# Altium PCB pcb 2022 prototip_2022-08-15.pcbdoc (part 2 of 2)
Units mm, origin at the board's own origin, x right, y up, seen from the top; angles counter-clockwise.
Board outline 345.4 x 226.4 mm, 2 copper layers (Top Layer, Bottom Layer); 44 components, 59 nets, 156 pads, 0 vias.
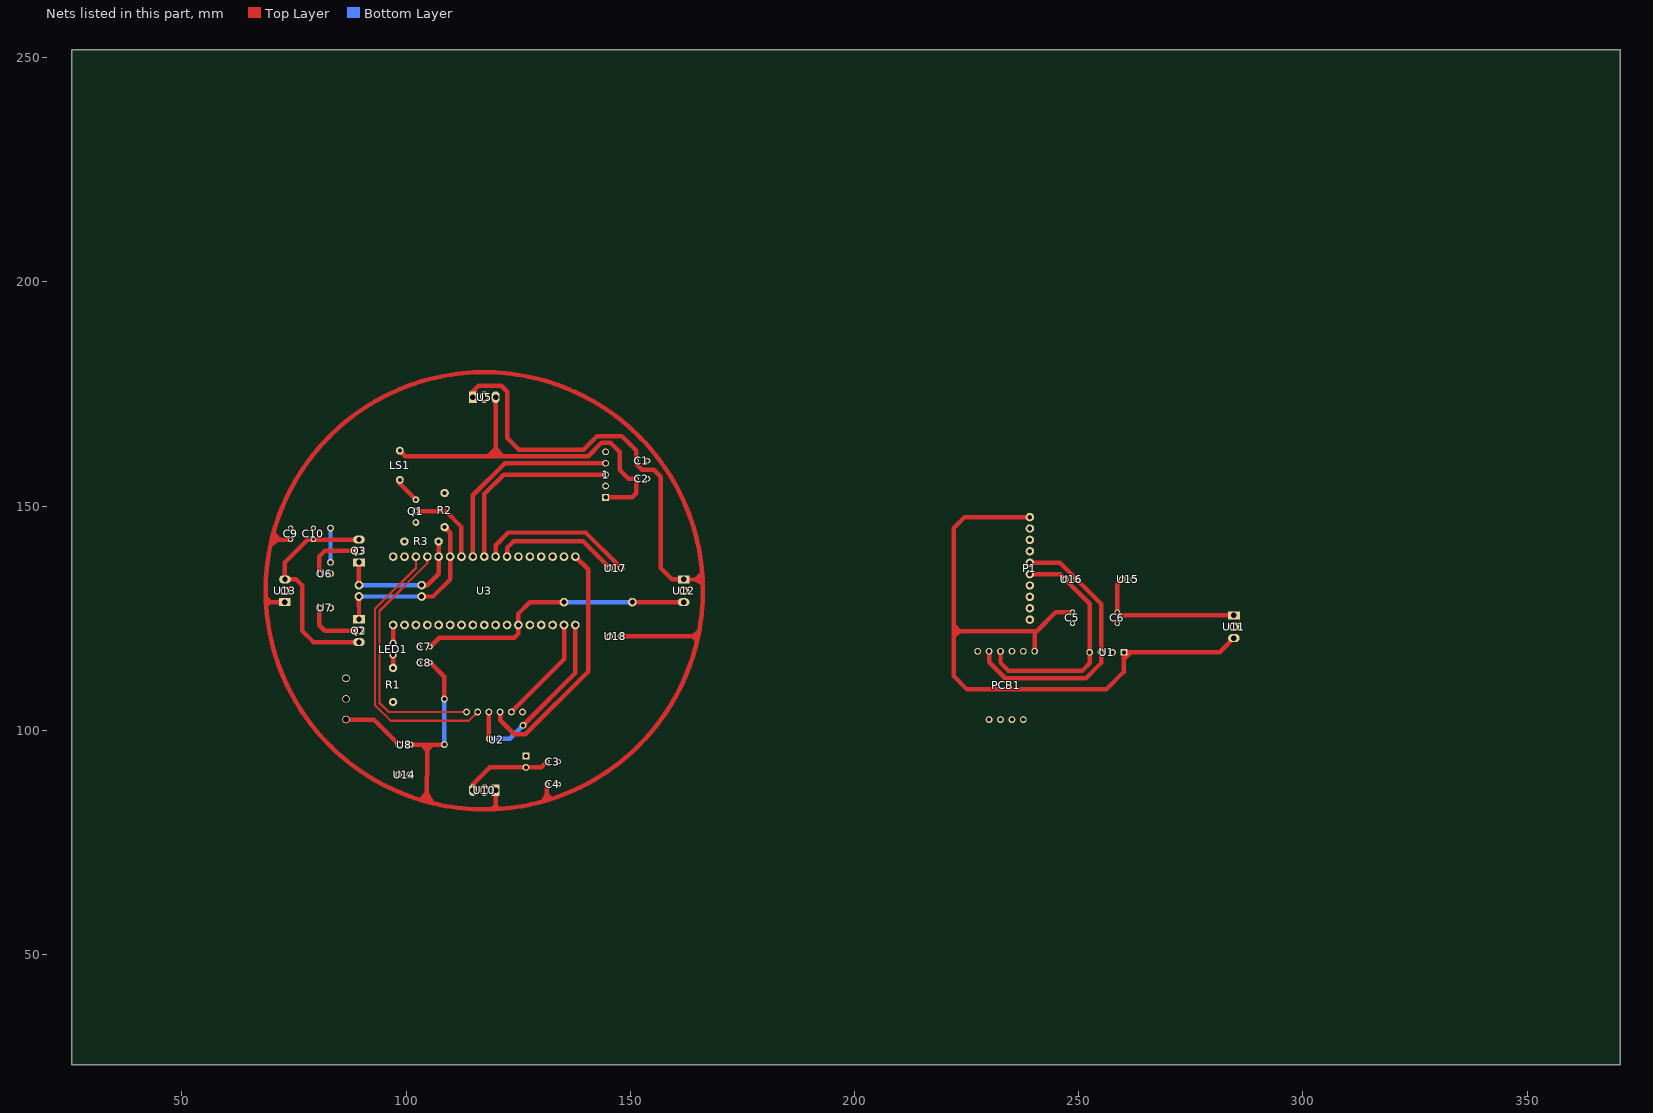
[diagram p2: the nets of this part, all layers, seen from the top]

## Nets (pads, with @x,y where several pads share a name; then routed paths per layer and width w, separated by ;. In a path a pad name is that pad's centre, name@x,y a point inside that pad or via, vN(x,y) a via of type N, cw(c..) or ccw(c..) an arc to the next point about the centre after c; other vN are vias at no path point)
1_5: 1.5
ARDUINO5V: C7.2 pad.P$12 U3.P$23 U12.3 | length 63.3
  Top Layer w1: C7.2@105.37,118.6 107.37,120.6 124.1,120.6 125.06,121.56 U3.P$23@125.06,123.48 125.06,126.02 127.6,128.56 pad.P$12@135.22,128.56 ; pad.P$12@150.46,128.56 U12.3@161.885,128.56
  Bottom Layer w1: pad.P$12@135.22,128.56 pad.P$12@150.46,128.56
ARDUINOBUZZER: Q1.2 U3.P$7 | length 18.2
  Top Layer w1: Q1.2@102.2,148.88 108.819,148.88 112.36,145.339 U3.P$7@112.36,138.72
ARDUINOLED: LED1.1 U3.P$34 | length 4.1
  Top Layer w1: LED1.1@97.1,119.37 97.1,123.46 U3.P$34@97.12,123.48
DIGITALPIN7: pad.14 Q2.1 R2.2 U3.P$6 | length 39.1
  Top Layer w1: pad.14@89.5,129.83 Q2.1@89.505,124.75 ; pad.14@103.47,129.83 106.01,129.83 109.82,133.64 U3.P$6@109.82,138.72 109.82,144.07 R2.2@108.6,145.29
  Bottom Layer w1: pad.14@89.5,129.83 pad.14@103.47,129.83
DIGITALPIN8: pad.13 Q3.1 R3.2 U3.P$5 | length 31.1
  Top Layer w1: Q3.1@89.495,137.45 pad.13@89.5,132.37 ; pad.13@103.47,132.37 104.74,132.37 107.28,134.91 U3.P$5@107.28,138.72 107.28,142.07 R3.2@107.25,142.1
  Bottom Layer w1: pad.13@89.5,132.37 pad.13@103.47,132.37
GND: 1.2 C1.1 C2.1 C3.1 C4.1 C5.1 C6.1 C7.1 C8.1 C9.1 C10.1 P1.9 pad.2 PCB1.3 Q1.1 R1.2 R2.1 R3.1 U1.2 U2.2 U3.P$12 U3.P$21 U5.2 U6.2 U7.2 U10.2 U11.2 U12.2 U13.2 U14.1 U14.2 U15.2 U18.1 | length 7.6
  Bottom Layer w1: pad.2@83.15,137.45 pad.2@83.15,145.07
GPS5V: 1.1 C2.2 LS1.- U5.3 | length 92.3
  Top Layer w1: LS1.-@98.6,162.35 99.85,161.1 121.397,161.1 ; 118.316,161.1 118.316,161.133 119.98,162.774 ; 119.98,161.1 119.98,166.755 ; U5.3@119.98,174.275 119.98,162.774 ; 1.1@144.491,151.928 150.427,151.928 151.329,152.83 C2.2@151.329,156.101 ; C2.2@151.329,156.094 149.599,156.094 147.6,158.1 147.6,162.113 145.601,164.1 143.599,164.1 140.6,161.097 121.601,161.097 119.98,162.774
GPSRX: 1.4 U3.P$8 | length 46.2
  Top Layer w1: U3.P$8@114.9,138.72 114.9,152.4 122.048,159.548 1.4@144.491,159.548
GPSTX: 1.3 U3.P$9 | length 42.8
  Top Layer w1: U3.P$9@117.44,138.72 117.44,152.69 121.758,157.008 1.3@144.491,157.008
LS1_+: LS1.+ Q1.3 | length 5.9
  Top Layer w1: LS1.+@98.6,155.85 98.6,155.02 Q1.3@102.2,151.42
MISO: U2.4 U3.P$19 | length 24.3
  Top Layer w1: U2.4@123.476,104.076 135.22,115.82 U3.P$19@135.22,123.48
MOSI: U2.5 U3.P$17 | length 55.4
  Top Layer w1: U2.5@120.976,104.076 120.976,102.223 124.1,99.101 126.599,99.101 140.6,113.099 140.6,135.88 U3.P$17@137.76,138.72
NRF5V: C3.2 U2.1 U10.3 | length 19.9
  Top Layer w1: U10.3@114.9,86.655 114.9,87.92 118.71,91.73 U2.1@126.726,91.725 ; U2.1@126.726,91.726 130.136,91.726 C3.2@131.41,93
NRFCE: U2.8 U3.P$4 | length 57.2
  Top Layer w0.5: U3.P$4@104.74,138.72 104.74,137.24 94.1,126.6 94.1,106.1 96.124,104.076 U2.8@113.476,104.076
NRFCSN: U2.7 U3.P$3 | length 62
  Top Layer w0.5: U3.P$3@102.2,138.72 102.2,136.2 93.099,127.099 93.099,105.601 96.599,102.101 114.001,102.101 U2.7@115.976,104.076
NRFSCK: pad.6 U2.6 U3.P$18 | length 42
  Top Layer w1: U2.6@118.476,104.076 118.476,98.224 pad.6@118.6,98.1 ; pad.6@126.099,101.1 137.76,112.759 U3.P$18@137.76,123.48
  Bottom Layer w1: pad.6@118.6,98.1 123.1,98.1 pad.6@126.1,101.1
P1_1: P1.1
P1_2: P1.2
P1_3: P1.3
P1_4: P1.4
P1_7: P1.7
P1_8: P1.8
PCB1_2: PCB1.2
PCB1_6: PCB1.6
PCB1_7: PCB1.7
PCB1_8: PCB1.8
PCB1_9: PCB1.9
PCB1_10: PCB1.10
PILGND: pad.3 U8.2 | length 14.1
  Top Layer w1: pad.3@86.6,102.4 92.77,102.4 U8.2@98.36,96.81
R1_1: LED1.2 R1.1 | length 2.9
  Top Layer w1: R1.1@97.1,113.91 LED1.2@97.1,116.83
S$1271: 
SCL: P1.6 PCB1.5 U1.3 U3.P$10 U16.2 U17.2 | length 98.2
  Top Layer w1: U3.P$10@119.98,138.72 119.98,141.26 122.82,144.1 140.031,144.1 U17.2@147.95,136.18 ; PCB1.5@230.012,117.617 230.013,115.187 233.599,111.6 251.6,111.6 254.981,114.981 U1.3@254.981,117.384 254.981,128.209 U16.2@249.55,133.64 245.819,137.369 P1.6@239.101,137.369
SDA: P1.5 PCB1.4 U1.4 U3.P$11 U16.1 U17.1 | length 81.1
  Top Layer w1: U3.P$11@122.52,138.72 122.52,140.681 123.94,142.101 139.49,142.101 U17.1@145.41,136.18 ; PCB1.4@232.552,117.617 232.553,115.047 234.28,113.32 250.82,113.32 252.441,114.941 U1.4@252.441,117.384 252.441,128.209 U16.1@247.01,133.64 245.819,134.829 P1.5@239.101,134.829
SENSOR5V: C5.2 P1.10 PCB1.1 U1.1 U11.3 | length 177.4
  Top Layer w1: 222.101,120.986 223.467,122.032 ; 222.101,122.032 227.191,122.032 ; 222.101,130.363 222.101,112.098 225.1,109.101 256.101,109.101 260.099,113.099 260.061,113.14 U1.1@260.061,117.384 281.42,117.384 U11.3@284.595,120.559 ; P1.10@239.101,147.529 224.529,147.529 222.101,145.1 222.101,123.399 223.467,122.032 ; PCB1.1@240.172,117.617 240.172,121.672 244.87,126.37 ; C5.2@248.6,126.37 244.87,126.37 ; 260.061,116.073 260.267,116.073 261.579,117.384 ; 223.467,122.032 240.6,122.1 244.87,126.37
TETIKLEYICILER: C10.2 Q2.3 Q3.3 U13.3 | length 50.7
  Top Layer w1: Q2.3@89.495,119.67 79.34,119.67 76.8,122.21 76.8,132.37 75.53,133.64 U13.3@72.995,133.64 72.995,137.455 78.07,142.53 C10.2@79.34,142.53 Q3.3@89.505,142.53
U2_3: U2.3
U3_P$1: U3.P$1
U3_P$2: U3.P$2
U3_P$13: U3.P$13
U3_P$14: U3.P$14
U3_P$15: U3.P$15
U3_P$16: U3.P$16
U3_P$20: U3.P$20
U3_P$22: U3.P$22
U3_P$24: U3.P$24
U3_P$25: U3.P$25
U3_P$26: U3.P$26
U3_P$27: U3.P$27
U3_P$28: U3.P$28
U3_P$29: U3.P$29
U3_P$30: U3.P$30
U3_P$31: U3.P$31
U3_P$32: U3.P$32
U3_P$33: U3.P$33
U4_1: pad.1@86.6,111.6
U6_1: Q3.2 U6.1 | length 13.2
  Top Layer w1: U6.1@80.64,134.91 80.64,138.75 81.88,139.99 Q3.2@89.495,139.99
U7_1: Q2.2 U7.1 | length 13.2
  Top Layer w1: U7.1@80.64,127.29 80.64,123.45 81.88,122.21 Q2.2@89.505,122.21
VCC: C1.2 C4.2 C6.2 C8.2 C9.2 pad.1@108.55,96.81 pad.1@108.55,106.97 U5.1 U8.1 U10.1 U11.1 U12.1 U13.1 U15.1 U18.2 | length 533
  Top Layer w1: 68.713,129.617 69.779,128.552 ; 68.801,127.819 69.534,128.552 69.779,128.552 ; 70.044,142.53 C9.2@74.26,142.53 ; 70.228,141.653 71.6,142.6 70.721,143.608 ; U13.1@72.985,128.56 69.779,128.552 ; U8.1@100.9,96.81 103.47,96.81 104.74,95.54 ; 102.564,96.81 106.065,96.81 ; 103.272,84.452 104.6,86.1 105.888,83.715 ; 104.638,84.059 104.74,95.54 ; 104.738,94.308 104.738,96.81 ; 104.74,96.81 pad.1@108.55,96.81 ; C8.2@105.37,115.1 108.55,111.92 pad.1@108.55,106.97 ; 105.853,96.81 104.74,95.54 ; U5.1@114.9,174.285 114.9,175.55 116.17,176.82 121.25,176.82 122.599,175.471 122.599,165.1 125.101,162.601 139.599,162.601 142.601,165.601 148.1,165.601 151.331,162.37 C1.2@151.33,160.1 151.331,159.37 152.601,158.1 155.21,158.1 156.81,156.5 156.81,136.18 159.35,133.64 U12.1@161.895,133.64 166.124,133.615 ; 119.111,82.378 119.975,83.241 ; 119.975,83.955 119.975,83.241 ; U10.1@119.975,86.645 119.975,83.241 ; 120.641,82.455 119.975,83.241 ; 130.488,84.128 131.41,85.69 ; C4.2@131.41,87.92 131.41,85.69 ; 132.396,84.699 131.41,85.69 ; U18.2@147.95,120.94 163.871,120.991 ; 164.9,119.962 163.871,120.991 ; 165.342,122.045 163.871,120.991 ; 165.928,134.898 164.6,133.6 166.025,132.708 ; U15.1@259.71,133.64 258.6,132.53 C6.2@258.6,126.37 259.329,125.639 U11.1@284.605,125.639 ; 166.19,131.1 ccw(c117.44,131.1) 166.19,131.1
  Bottom Layer w1: pad.1@108.55,96.81 pad.1@108.55,106.97

## Polygon pours and split planes (outlines as drawn)
GND on Top Layer (solid): 38.1,207.1 38.1,59.1 45.1,52.1 344.1,52.1 358.1,38.1 358.1,181.6 300.6,239.1

## Keep-outs
Keep-Out Layer:
  circle w0.254 net S$1271: c117.44,131.1 r50
  circle w0.254 net S$1271: c254.6,131.1 r50

## Other copper
Top Layer:
  region net TETIKLEYICILER: 72.595,134.54 73.395,134.54 73.495,136.04 72.495,136.04
  region net TETIKLEYICILER: 73.395,134.54 73.395,132.74 74.895,133.14 74.895,134.14
  region net ARDUINO5V: 161.485,129.46 161.485,127.66 159.985,128.06 159.985,129.06
  region net SENSOR5V: 284.995,119.66 284.195,119.66 282.358,119.029 283.466,118.723
  region net NRF5V: 115.74,86.733 114.059,87.376 114.924,88.651 115.947,88.26
  region net GPS5V: 120.88,173.875 119.08,173.875 119.48,172.375 120.48,172.375
  region net TETIKLEYICILER: 89.105,141.63 89.105,143.43 87.605,143.03 87.605,142.03
  region net U6_1: 89.095,139.09 89.095,140.89 87.595,140.49 87.595,139.49
  region net TETIKLEYICILER: 89.095,120.57 89.095,118.77 87.595,119.17 87.595,120.17
  region net U7_1: 89.105,121.31 89.105,123.11 87.605,122.71 87.605,121.71
  region net SENSOR5V: 260.823,116.622 259.299,116.622 259.561,115.122 260.561,115.122
  region net SENSOR5V: 260.823,118.146 260.823,116.622 262.323,116.884 262.323,117.884
  region net VCC: 71.685,127.66 71.685,129.46 70.185,129.053 70.185,128.053
  region net VCC: 163.195,134.54 163.195,132.74 164.695,133.123 164.695,134.123
  region net VCC: 160.595,132.74 160.595,134.54 159.35,134.14 159.35,133.14
  region net VCC: 283.305,124.74 283.305,126.54 281.805,126.139 281.805,125.139
  region net VCC: 120.88,85.345 119.08,85.345 119.475,83.845 120.475,83.845
  region net VCC: 114,175.585 115.8,175.585 116.524,176.466 115.463,176.82
  region net DIGITALPIN8: 90.746,136.55 88.246,136.55 88.997,135.05 89.997,135.05
  region net DIGITALPIN7: 88.254,125.65 90.754,125.65 90.003,127.15 89.003,127.15
  region net GPS5V: 145.245,152.682 145.245,151.174 146.745,151.428 146.745,152.428
  region net VCC: 109.121,107.474 107.978,107.474 108.05,108.236 109.05,108.236
  region net VCC: 108.046,96.238 108.046,97.381 107.284,97.31 107.284,96.31
  region net DIGITALPIN7: 104.108,129.106 104.108,130.554 105.074,130.33 105.074,129.33
  region net DIGITALPIN8: 104.108,131.646 104.108,133.094 104.74,132.87 104.74,131.87
  region net DIGITALPIN7: 90.225,129.192 88.777,129.191 89.002,128.226 90.002,128.227
  region net DIGITALPIN8: 90.223,133.009 88.775,133.008 88.998,133.973 89.998,133.974
  region net ARDUINO5V: 151.098,127.836 151.098,129.284 152.064,129.06 152.064,128.06
  region net ARDUINO5V: 134.582,127.836 134.582,129.284 133.616,129.06 133.616,128.06
  region net NRFSCK: 126.052,101.86 126.861,101.053 127.349,101.642 126.641,102.349
  region net NRFSCK: 119.119,98.658 117.982,98.546 117.976,99.311 118.976,99.409
  region net VCC: 148.456,120.37 148.452,121.513 149.214,121.444 149.218,120.444
  region net SCL: 147.189,136.132 147.998,136.94 147.409,137.429 146.701,136.722
  region net SDA: 144.649,136.132 145.458,136.94 144.869,137.429 144.161,136.722
  region net PILGND: 97.6,96.762 98.408,97.57 97.818,98.059 97.111,97.352
  region net VCC: 101.404,96.238 101.404,97.381 102.166,97.31 102.166,96.31
  region net U7_1: 81.212,126.786 80.069,126.786 80.141,126.024 81.141,126.024
  region net U6_1: 81.212,135.414 80.069,135.414 80.141,136.176 81.141,136.176
  region net PILGND: 87.162,101.762 87.162,103.037 88.012,102.9 88.012,101.9
  region net ARDUINOLED: 97.836,122.833 96.388,122.851 96.6,121.883 97.6,121.87
  region net ARDUINO5V: 125.784,122.842 124.336,122.842 124.56,121.876 125.56,121.876
  region net ARDUINO5V: 125.784,124.118 124.336,124.118 124.56,125.084 125.56,125.084
  region net MISO: 135.944,122.842 134.496,122.842 134.72,121.876 135.72,121.876
  region net NRFSCK: 138.484,122.842 137.036,122.842 137.26,121.876 138.26,121.876
  region net MOSI: 137.7,137.757 138.723,138.78 139.247,137.94 138.54,137.233
  region net SDA: 123.244,139.358 121.796,139.358 122.02,140.324 123.02,140.324
  region net SCL: 120.704,139.358 119.256,139.358 119.48,140.324 120.48,140.324
  region net GPSTX: 118.164,139.358 116.716,139.358 116.94,140.324 117.94,140.324
  region net GPSRX: 115.624,139.358 114.176,139.358 114.4,140.324 115.4,140.324
  region net ARDUINOBUZZER: 113.084,139.358 111.636,139.358 111.86,140.324 112.86,140.324
  region net DIGITALPIN7: 110.544,139.358 109.096,139.358 109.32,140.324 110.32,140.324
  region net DIGITALPIN7: 110.544,138.082 109.096,138.082 109.32,137.116 110.32,137.116
  region net DIGITALPIN8: 108.004,139.358 106.556,139.358 106.78,140.324 107.78,140.324
  region net DIGITALPIN8: 108.004,138.082 106.556,138.082 106.78,137.116 107.78,137.116
  region net NRFCE: 105.464,138.082 104.016,138.082 104.49,137.24 104.99,137.24
  region net NRFCSN: 102.924,138.082 101.476,138.082 101.95,137.116 102.45,137.116
  region net NRF5V: 126.222,91.154 126.222,92.297 125.46,92.226 125.46,91.226
  region net NRF5V: 127.23,91.154 127.23,92.297 127.992,92.226 127.992,91.226
  region net MISO: 123.428,104.836 124.237,104.028 124.725,104.618 124.018,105.325
  region net MOSI: 121.547,103.572 120.404,103.572 120.476,102.81 121.476,102.81
  region net NRFSCK: 119.048,103.572 117.905,103.572 117.976,102.81 118.976,102.81
  region net NRFCSN: 115.216,104.124 116.024,103.315 115.258,103.004 114.904,103.358
  region net NRFCE: 112.972,104.647 112.972,103.504 112.21,103.826 112.21,104.326
  region net SDA: 253.012,117.888 251.869,117.888 251.941,118.65 252.941,118.65
  region net SDA: 253.012,116.88 251.869,116.88 251.941,116.118 252.941,116.118
  region net SCL: 255.552,117.888 254.409,117.888 254.481,118.65 255.481,118.65
  region net SCL: 255.552,116.88 254.409,116.88 254.481,116.118 255.481,116.118
  region net DIGITALPIN8: 106.557,141.465 107.967,141.492 107.78,140.548 106.78,140.529
  region net DIGITALPIN7: 108.541,144.352 109.538,145.349 110.058,144.539 109.351,143.832
  region net R1_1: 97.805,114.532 96.395,114.532 96.6,115.471 97.6,115.471
  region net LS1_+: 101.439,151.372 102.248,152.18 101.658,152.669 100.951,151.962
  region net ARDUINOBUZZER: 102.704,148.308 102.704,149.451 103.466,149.38 103.466,148.38
  region net SCL: 230.584,117.113 229.441,117.113 229.513,116.351 230.513,116.351
  region net SDA: 233.124,117.113 231.981,117.113 232.053,116.351 233.053,116.351
  region net SENSOR5V: 240.743,118.121 239.6,118.121 239.672,118.883 240.672,118.883
  region net SENSOR5V: 238.479,146.825 238.478,148.234 237.538,148.029 237.539,147.029
  region net SCL: 239.722,138.074 239.721,136.665 240.661,136.869 240.662,137.869
  region net SDA: 239.722,135.534 239.721,134.125 240.661,134.329 240.662,135.329
  region net LS1_+: 99.436,155.549 98.196,155.058 98.637,154.276 99.65,154.677
  region net GPS5V: 98.544,161.463 99.487,162.406 99.998,161.659 99.291,160.952
  region net R1_1: 97.719,116.284 96.481,116.284 96.6,115.459 97.6,115.459
  region net ARDUINOLED: 97.719,119.916 96.481,119.916 96.6,120.742 97.6,120.742
  region net TETIKLEYICILER: 79.735,142.082 79.735,142.978 80.332,143.03 80.332,142.03
  region net TETIKLEYICILER: 78.945,142.082 78.945,142.978 78.348,143.03 78.348,142.03
  region net VCC: 73.865,142.082 73.865,142.978 73.268,143.03 73.268,142.03
  region net VCC: 105.333,114.504 105.966,115.137 106.425,114.752 105.718,114.045
  region net ARDUINO5V: 105.333,119.196 105.966,118.563 106.425,118.948 105.718,119.655
  region net VCC: 258.562,125.774 259.196,126.407 259.654,126.021 258.947,125.315
  region net VCC: 259.048,126.765 258.152,126.765 258.1,127.362 259.1,127.362
  region net SENSOR5V: 248.205,125.922 248.205,126.818 247.608,126.87 247.608,125.87
  region net VCC: 131.858,87.525 130.962,87.525 130.91,86.928 131.91,86.928
  region net NRF5V: 130.814,93.037 131.447,92.404 131.062,91.945 130.355,92.652
  region net GPS5V: 151.777,155.705 150.882,155.706 150.829,155.109 151.829,155.108
  region net GPS5V: 150.938,155.65 150.932,156.545 150.335,156.594 150.341,155.594
  region net VCC: 151.778,159.706 150.883,159.704 150.831,159.369 151.831,159.371
  region net VCC: 151.778,160.494 150.883,160.495 150.831,161.092 151.831,161.091
  region net GPSRX: 143.992,158.982 143.992,160.113 143.238,160.048 143.238,159.048
  region net GPSTX: 143.992,156.442 143.992,157.573 143.238,157.508 143.238,156.508
  region net SCL: 249.502,132.879 250.311,133.688 250.799,133.098 250.092,132.391
  region net SCL: 248.79,133.592 249.598,134.4 249.008,134.889 248.301,134.182
  region net SDA: 246.962,132.879 247.771,133.688 248.259,133.098 247.552,132.391
  region net SDA: 246.25,133.592 247.057,134.401 246.467,134.888 245.761,134.181
  region net VCC: 258.95,133.688 259.758,132.879 259.168,132.391 258.461,133.098
Bottom Layer:
  region net GND: 83.721,144.566 82.578,144.566 82.65,143.804 83.65,143.804
  region net GND: 83.721,137.954 82.578,137.954 82.65,138.716 83.65,138.716
  region net VCC: 109.121,106.466 107.978,106.466 108.05,105.704 109.05,105.704
  region net VCC: 109.121,97.314 107.978,97.314 108.05,98.076 109.05,98.076
  region net DIGITALPIN7: 102.832,129.106 102.832,130.554 101.866,130.33 101.866,129.33
  region net DIGITALPIN8: 102.832,131.646 102.832,133.094 101.866,132.87 101.866,131.87
  region net DIGITALPIN7: 90.138,129.106 90.138,130.554 91.104,130.33 91.104,129.33
  region net DIGITALPIN8: 90.138,131.646 90.138,133.094 91.104,132.87 91.104,131.87
  region net ARDUINO5V: 149.822,127.836 149.822,129.284 148.856,129.06 148.856,128.06
  region net ARDUINO5V: 135.858,127.836 135.858,129.284 136.824,129.06 136.824,128.06
  region net NRFSCK: 125.34,101.148 126.148,100.34 125.558,99.851 124.851,100.558
  region net NRFSCK: 119.104,98.672 119.104,97.529 119.866,97.6 119.866,98.6

## Silkscreen, mask and mechanical layers (free items; w line width, h text height)
Top Overlay:
  lines w0.254: 83.044,100.5 90.044,100.5 90.044,113.5 83.044,113.5 83.044,100.5

## Text inside footprints (layer, text, board x,y; h text height)
1: Top Overlay "VCC" at 142.586,152.563 h1.27 r180; Top Overlay "GND" at 142.586,155.103 h1.27 r180; Top Overlay "TXD" at 142.586,157.643 h1.27 r180; Top Overlay "RXD" at 142.586,160.183 h1.27 r180; Top Overlay "PPS" at 142.586,162.723 h1.27 r180; Top Overlay "ANT" at 119.345,154.468 h1.27 r180; Top Overlay "GPS" at 132.68,159.548 h2.03 r180
PCB1: Document "Vin" at 241.442,116.347 h1.27 r180; Document "3Vo" at 238.902,116.347 h1.27 r176; Document "GND" at 236.362,116.347 h1.27 r179; Document "SDA" at 233.568,116.347 h1.27 r181; Document "SCL" at 231.028,116.347 h1.27 r180; Document "RST" at 228.488,116.347 h1.27 r180; Document "PS0" at 238.902,104.409 h1.27 r180; Document "PS1" at 236.108,104.409 h1.27 r181; Document "INT" at 233.568,104.409 h1.27 r180; Document "ADR" at 231.028,104.409 h1.27 r180
U1: Top Overlay "VCC" at 259.811,116.114 h0.5 r270; Top Overlay "GND" at 257.271,116.114 h0.5 r270; Top Overlay "SCL" at 254.731,116.114 h0.5 r270; Top Overlay "SDA" at 252.191,116.114 h0.5 r270
U2: Top Overlay "CE" at 114.334,98.653 h2.03 r91; Top Overlay "CSN" at 116.747,98.526 h2.03 r90; Top Overlay "SCK" at 119.414,98.272 h2.03 r90; Top Overlay "MOSI" at 122.012,97.826 h2.03 r90; Top Overlay "MISO" at 124.24,97.637 h2.03 r90; Top Overlay "IRO" at 126.6,98.6 h2.03 r90; Top Overlay "VCC" at 124.748,92.43 h2.03 r180; Top Overlay "GND" at 124.621,94.97 h2.03 r181